# EAGLE board line_follower_pelican (EAGLE 9.3.1)
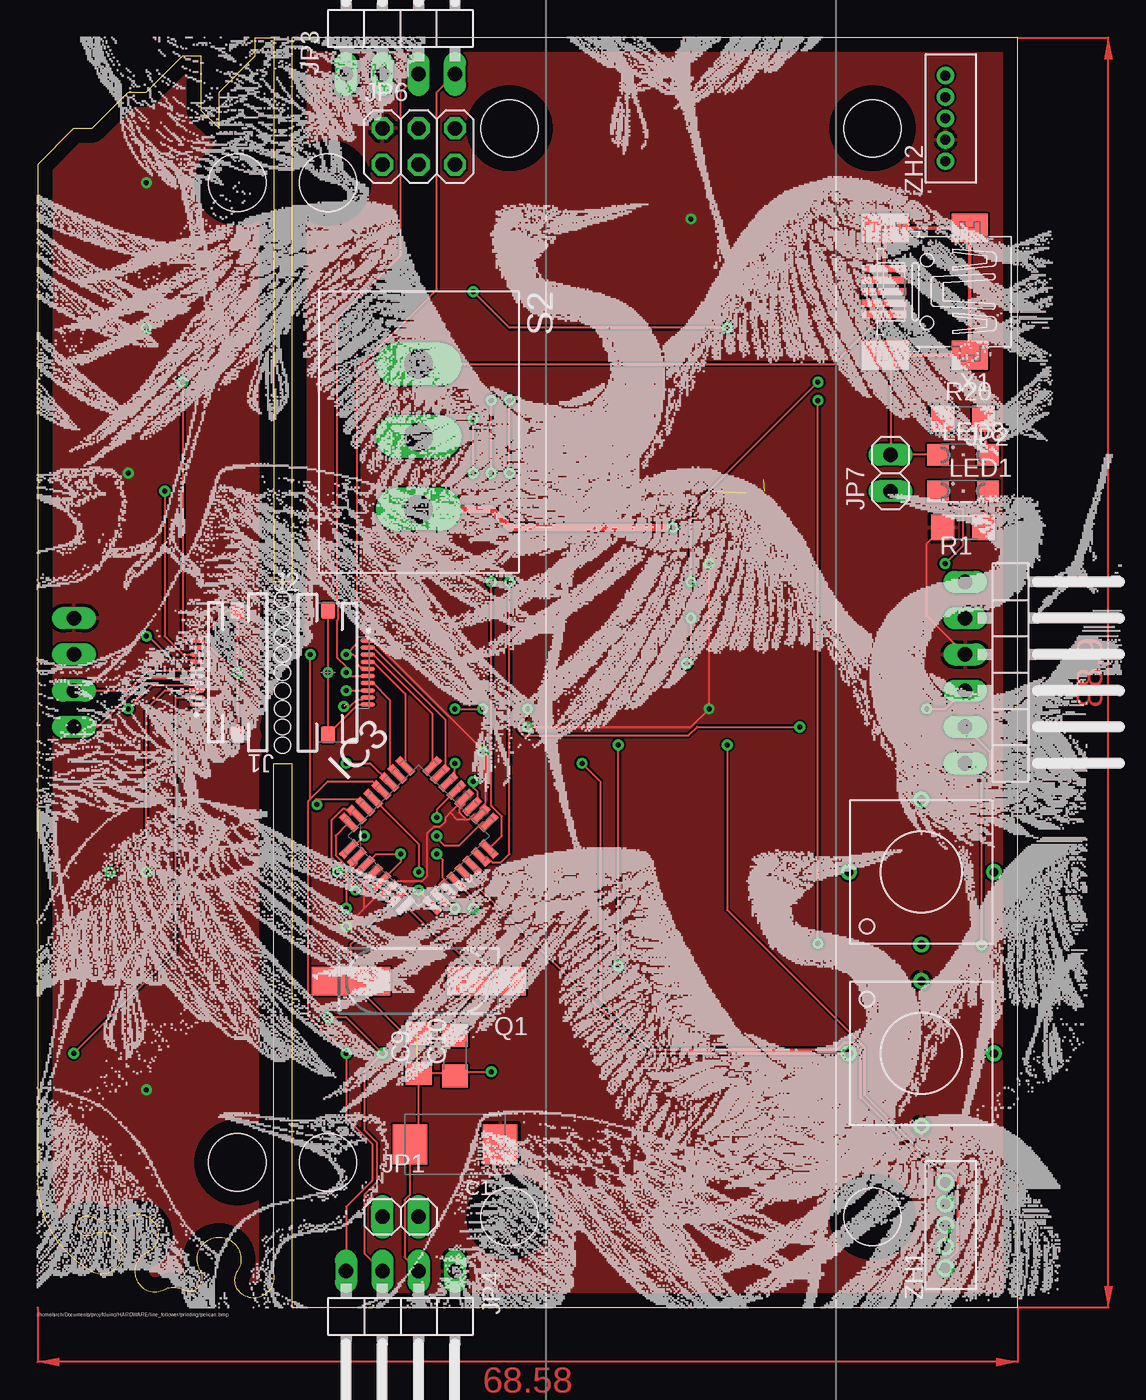
[diagram p0: board, top side]
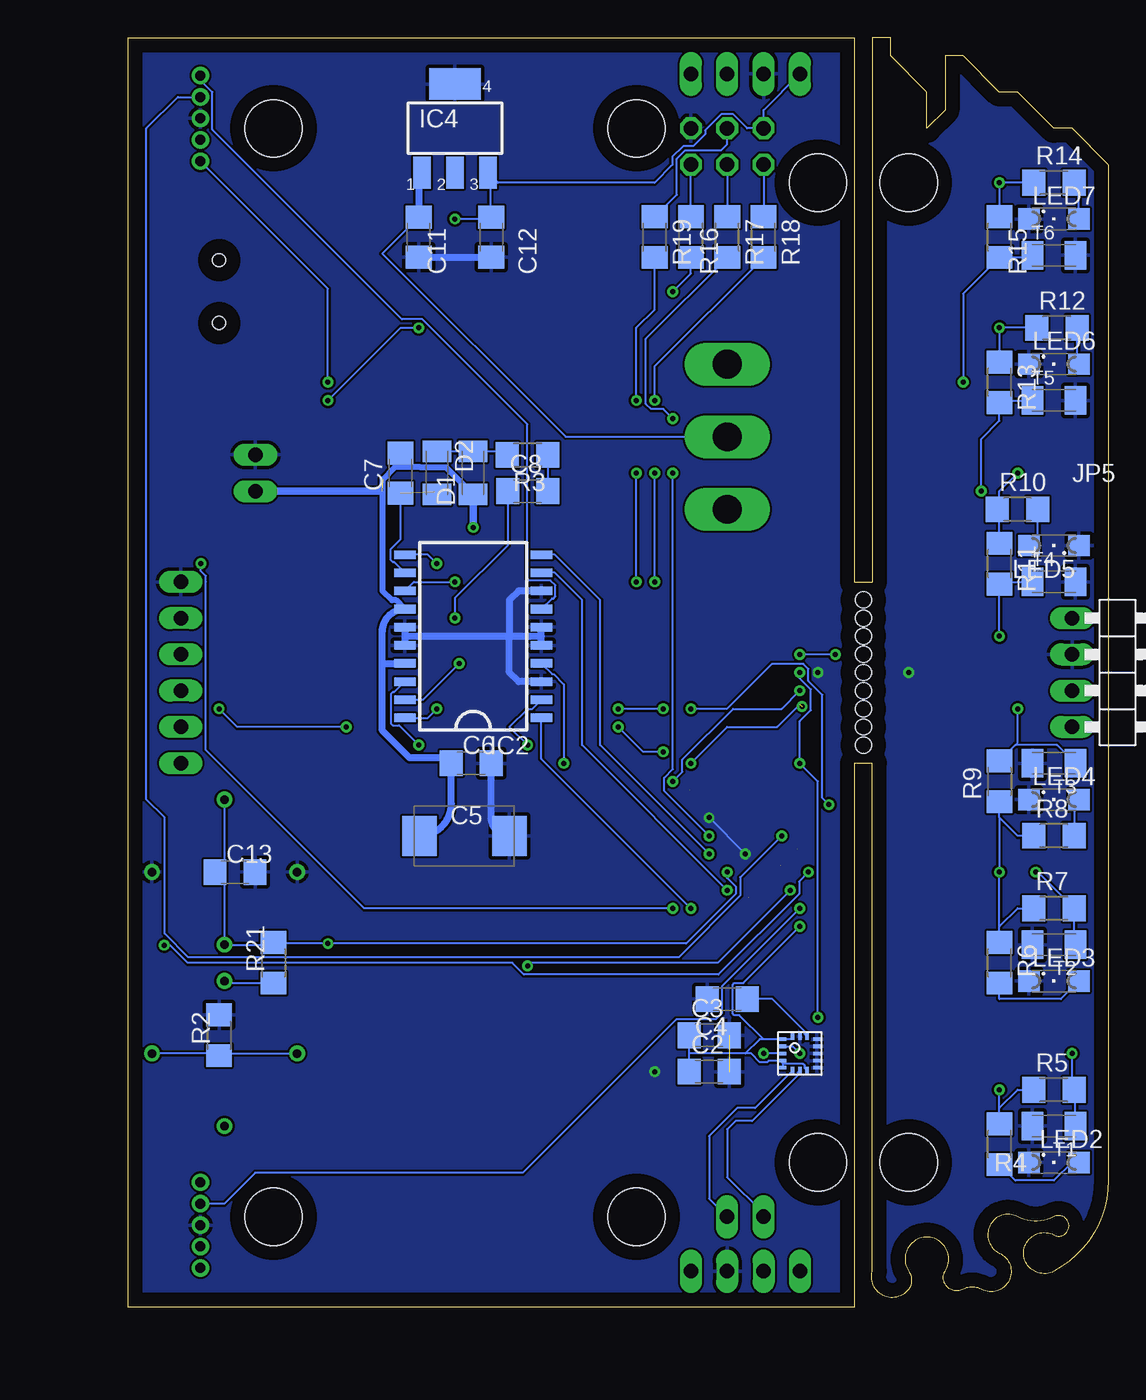
[diagram p1: board, bottom side, seen from below]

Size 68.58 x 88.9 mm. Coordinates in mm from the lower left corner, seen from the top.
Outline: 16.51,38.1 17.78,38.1 17.78,0 68.58,0 68.58,88.9 17.78,88.9 17.78,50.8 16.51,50.8 16.51,88.9 15.24,88.9 15.24,87.63 12.7,85.09 12.7,82.55 11.43,83.82 11.43,87.63 10.16,87.63 7.62,85.09 6.35,85.09 3.81,82.55 2.54,82.55 0,80.01 0,8.89 arc62 3.81,2.54 arc236 3.81,5.08 arc-236 3.81,6.35 arc56 6.35,6.35 arc-183 7.62,3.81 arc183 8.89,1.27 arc-56 10.16,1.27 arc146 11.43,2.54 arc-248 13.97,2.54 arc68 13.97,1.27 arc159 16.51,2.54 16.51,38.1
Copper layers (1*16): Top 0.035mm / dielectric 1.5mm / Bottom 0.035mm
Design rules "default": minimum track width 6mil, minimum drill 0.35mm, track to track 6mil, track to pad 6mil, pad to pad 6mil, via to via 6mil, smd to smd 6mil, copper to edge 40mil, drill to drill 6mil, minimum pad ring 10mil, minimum via ring 8mil, stop-mask expansion 4mil, vias tented up to drill 0mil, thermal gap 10mil
Holes 1.12 mm at 17.14,39.37 17.14,40.64 17.14,41.91 17.14,43.18 17.14,44.45 17.14,45.72 17.14,46.99 17.14,48.26 17.14,49.53
Holes 4 mm at 33.02,6.35 58.42,6.35 58.42,82.55 33.02,82.55 13.97,10.16 13.97,78.74 20.32,78.74 20.32,10.16

## Footprints (pad centres in the part's own frame; a part is rotated, then mirrored left to right if it is on the bottom)
SMC_D = smd 2.4 x 2.8: + -3.15,0; - 3.15,0
C1206 = smd 1.6 x 1.8: 1 -1.4,0; 2 1.4,0
1206 = smd 1.5 x 2: 1 -1.5,0; 2 1.5,0
LGA-16 = smd 0.5 x 0.25: 1 -1.19,1; 2 -1.19,0.5; 3 -1.19,0; 4 -1.19,-0.5; 5 -1.19,-1; 9 1.19,-1; 10 1.19,-0.5; 11 1.19,0; 12 1.19,0.5; 13 1.19,1 | smd 0.25 x 0.5: 6 -0.5,-1.19; 7 0,-1.19; 8 0.5,-1.19; 14 0.5,1.19; 15 0,1.19; 16 -0.5,1.19
SO20 = smd 0.6 x 1.5: 1 -5.715,-4.78; 2 -4.445,-4.78; 3 -3.175,-4.78; 4 -1.905,-4.78; 5 -0.635,-4.78; 6 0.635,-4.78; 7 1.905,-4.78; 8 3.175,-4.78; 9 4.445,-4.78; 10 5.715,-4.78; 11 5.715,4.78; 12 4.445,4.78; 13 3.175,4.78; 14 1.905,4.78; 15 0.635,4.78; 16 -0.635,4.78; 17 -1.905,4.78; 18 -3.175,4.78; 19 -4.445,4.78; 20 -5.715,4.78
TQFP32 = smd 1.473 x 0.508: 1 -4.115,2.794; 2 -4.115,2.007; 3 -4.115,1.194; 4 -4.115,0.406; 5 -4.115,-0.406; 6 -4.115,-1.194; 7 -4.115,-2.007; 8 -4.115,-2.794; 17 4.115,-2.794; 18 4.115,-2.007; 19 4.115,-1.194; 20 4.115,-0.406; 21 4.115,0.406; 22 4.115,1.194; 23 4.115,2.007; 24 4.115,2.794 | smd 0.508 x 1.473: 9 -2.794,-4.115; 10 -2.007,-4.115; 11 -1.194,-4.115; 12 -0.406,-4.115; 13 0.406,-4.115; 14 1.194,-4.115; 15 2.007,-4.115; 16 2.794,-4.115; 25 2.794,4.115; 26 2.007,4.115; 27 1.194,4.115; 28 0.406,4.115; 29 -0.406,4.115; 30 -1.194,4.115; 31 -2.007,4.115; 32 -2.794,4.115
SOT223 = smd 1.219 x 2.235: 1 -2.311,-3.099; 2 0,-3.099; 3 2.311,-3.099 | smd 3.6 x 2.2: 4 0,3.099
GCT_FFC2B05-10-X_REVC = smd 0.3 x 1: 1 -2.25,2.78; 2 -1.75,2.78; 3 -1.25,2.78; 4 -0.75,2.78; 5 -0.25,2.78; 6 0.25,2.78; 7 0.75,2.78; 8 1.25,2.78; 9 1.75,2.78; 10 2.25,2.78 | smd 1.2 x 0.95: 11 -4.35,0; 12 4.35,0
1X02 = drill 1.016 long: 1 -1.27,0; 2 1.27,0
1X06/90 = drill 1.016 long: 1 -6.35,-3.81; 2 -3.81,-3.81; 3 -1.27,-3.81; 4 1.27,-3.81; 5 3.81,-3.81; 6 6.35,-3.81
1X04/90 = drill 1.016 long: 1 -3.81,-3.81; 2 -1.27,-3.81; 3 1.27,-3.81; 4 3.81,-3.81
2X03 = drill 1.016 octagon: 1 -2.54,-1.27; 2 -2.54,1.27; 3 0,-1.27; 4 0,1.27; 5 2.54,-1.27; 6 2.54,1.27
SML1206 = smd 1.5 x 1.5: A 1.75,0; C -1.75,0
CSM-7X-DU = smd 5.5 x 2: 1 -4.75,0; 2 4.75,0
R1206 = smd 1.6 x 1.803: 1 -1.422,0; 2 1.422,0
BUTTON = drill 0.6: A@1 -5.08,0; A@2 5.08,0; B@1 0,5.08; B@2 0,-5.08
DUALSWITCH = drill 2 long: A 0,5.08; B 0,-5.08; COM 0,0
32005-201 = smd 3.1 x 0.5: 1 3,1.6; 2 3,0.8; 3 3,0; 4 3,-0.8; 5 3,-1.6 | smd 2.5 x 2: M1 -3,-4.45; M2 -3,4.45 | smd 3.3 x 2: M3 2.9,4.45; M4 2.9,-4.45 | hole 0.9: 0,2.2; 0,-2.2
B5B-ZR = drill 0.7: 1 7.5,-1.3; 2 6,-1.3; 3 4.5,-1.3; 4 3,-1.3; 5 1.5,-1.3

## Placement (x,y rotation side)
C1  10u  [SMC_D]  29.21,11.43 180 top
C2  100n  [C1206]  27.94,16.51 0 bottom
C3  100n  [C1206]  27.94,19.05 0 bottom
C4  10n  [C1206]  26.67,21.59 180 bottom
C5  100u  [SMC_D]  45.06,33.02 0 bottom
C6  100n  [C1206]  44.58,38.1 0 bottom
C7  10n  [C1206]  49.53,58.42 90 bottom
C8  10n  [C1206]  40.64,57.15 0 bottom
C9  22p  [C1206]  26.67,17.78 90 top
C10  22p  [C1206]  29.21,17.63 90 top
C11  100n  [C1206]  48.26,74.93 270 bottom
C12  100n  [C1206]  43.18,74.93 270 bottom
C13  100n  [C1206]  61.11,30.48 0 bottom
D1  1N4148  [1206]  44.45,58.42 90 bottom
D2  1N4148  [1206]  46.99,58.42 270 bottom
IC1  L3GD20HSMD  [LGA-16]  21.59,17.78 0 bottom
IC2  L6205  [SO20]  44.45,46.99 90 bottom
IC3  ATMEGA328PMA  [TQFP32]  26.67,33.02 45 top
IC4  LF33  [SOT223]  45.72,82.55 0 bottom
J1  FFC2B05-10-X_REVC  [GCT_FFC2B05-10-X_REVC]  13.97,44.45 90 top
J2  FFC2B05-10-X_REVC  [GCT_FFC2B05-10-X_REVC]  20.32,44.45 270 top
JP1  [1X02]  25.4,6.35 0 top
JP2  UART  [1X06/90]  68.72,44.45 270 top
JP3  RDS  [1X04/90]  25.4,90.17 0 top
JP4  LDS  [1X04/90]  25.4,-1.27 180 top
JP5  FDS  [1X04/90]  -1.27,44.45 270 bottom
JP6  ICSP  [2X03]  26.67,81.28 0 top
JP7  3S/4S  [1X02]  59.69,58.42 90 top
LED1  Purple  [SML1206]  64.77,57.15 0 top
LED2  White  [SML1206]  3.81,10.16 0 bottom
LED3  White  [SML1206]  3.81,22.86 0 bottom
LED4  White  [SML1206]  3.81,35.56 0 bottom
LED5  White  [SML1206]  3.81,53.34 180 bottom
LED6  White  [SML1206]  3.81,66.04 0 bottom
LED7  White  [SML1206]  3.81,76.2 0 bottom
LED8  Orange  [SML1206]  64.77,59.69 0 top
Q1  10MHz  [CSM-7X-DU]  26.67,22.86 180 top
R1  680  [R1206]  64.77,54.61 180 top
R2  1k  [R1206]  62.23,19.05 90 bottom
R3  220  [R1206]  40.64,59.69 180 bottom
R4  220  [R1206]  7.62,11.43 270 bottom
R5  10k  [R1206]  3.81,15.24 0 bottom
R6  220  [R1206]  7.62,24.13 270 bottom
R7  10k  [R1206]  3.81,27.94 0 bottom
R8  220  [R1206]  3.81,33.02 0 bottom
R9  10k  [R1206]  7.62,36.83 90 bottom
R10  220  [R1206]  6.35,55.88 0 bottom
R11  10k  [R1206]  7.62,52.07 270 bottom
R12  220  [R1206]  3.59,68.58 0 bottom
R13  10k  [R1206]  7.62,64.77 270 bottom
R14  220  [R1206]  3.81,78.74 0 bottom
R15  10k  [R1206]  7.62,74.93 270 bottom
R16  120  [R1206]  29.21,74.93 270 bottom
R17  120  [R1206]  26.67,74.93 270 bottom
R18  120  [R1206]  24.13,74.93 270 bottom
R19  120  [R1206]  31.75,74.93 270 bottom
R20  220  [R1206]  64.77,62.23 0 top
R21  100k  [R1206]  58.42,24.13 90 bottom
S1  BUTTON  [BUTTON]  61.85,17.78 0 top
S2  DUALSWITCH  [DUALSWITCH]  26.67,60.96 180 top
S3  BUTTON  [BUTTON]  61.85,30.48 90 top
T1  ELPT15-21C  [1206]  3.81,12.7 180 bottom
T2  ELPT15-21C  [1206]  3.81,25.4 180 bottom
T3  ELPT15-21C  [1206]  3.81,38.1 180 bottom
T4  ELPT15-21C  [1206]  3.81,50.8 0 bottom
T5  ELPT15-21C  [1206]  3.81,63.5 0 bottom
T6  ELPT15-21C  [1206]  3.81,73.66 0 bottom
X1  MINI-USB-SCHIELD-32005-201  [32005-201]  62.23,71.12 180 top
ZH1  LM  [B5B-ZR]  62.23,1.27 90 top
ZH2  RM  [B5B-ZR]  62.23,78.74 90 top

## Library data of the parts
C1-C13 = rcl; SPICEPREFIX: C
D1 D2 IC1-IC3 S1-S3 T1-T6 = martinmake
IC4 = linear
J1 J2 = FFC2B05-10-X_REVC; AVAILABILITY: Unavailable; DESCRIPTION: FFC/FPC CONNECTOR, RECEPTACLE, 10POS, 1ROW; Series: FFC2B05; Gender: Receptacle; Pitch Spacing: 0.5mm; No. of Contact...; MF: Global Connector Technology; MP: FFC2B05-10-T; PACKAGE: None; PRICE: None
JP1-JP7 = pinhead
LED1-LED8 = led
Q1 = crystal; OC_FARNELL: unknown; OC_NEWARK: unknown
R1-R21 = rcl; SPICEPREFIX: R
X1 = con-cypressindustries; OC_FARNELL: unknown; OC_NEWARK: unknown
ZH1 ZH2 = jst

## Nets
!RESET: C13.1 IC3.29 R16.2 R21.2 S3.A@1 S3.A@2
!SS: IC3.14
ADC0: IC3.23 J2.2
ADC1: IC3.24 J2.3
ADC2: IC3.25 J2.4
ADC3: IC3.26 J2.7
ADC6: IC3.19 J2.8
ADC7: IC3.22 J2.9
DIRA: IC2.2 IC3.2
DIRB: IC2.10 IC3.11
F_ADC0: J1.2 R5.2 T1.1
F_ADC1: J1.3 R7.2 T2.1
F_ADC2: J1.4 R9.2 T3.1
F_ADC3: J1.7 R11.2 T4.1
F_ADC6: J1.8 R13.2 T5.1
F_ADC7: J1.9 R15.2 T6.1
F_GND: J1.10 J1.11 J1.12 JP5.2 LED2.C LED3.C LED4.C LED5.C LED6.C LED7.C T1.2 T2.2 T3.2 T4.2 T5.2 T6.2
F_SCL: J1.5 JP5.4
F_SDA: J1.6 JP5.3
F_VCC: J1.1 JP5.1 R4.1 R5.1 R6.1 R7.1 R8.1 R9.1 R10.1 R11.1 R12.1 R13.1 R14.1 R15.1
GND: C1.- C2.2 C3.2 C4.2 C5.- C6.2 C9.1 C10.1 C11.2 C12.2 C13.2 IC1.9 IC1.10 IC1.11 IC1.12 IC1.13 IC1.15 IC2.3 IC2.5 IC2.6 IC2.8 IC2.15 IC2.16 IC3.3 IC3.5 IC3.21 IC4.4 J2.10 J2.11 J2.12 JP2.1 JP3.2 JP4.2 JP6.6 JP7.2 LED8.C R2.2 S3.B@1 S3.B@2 X1.5 X1.M1 X1.M2 X1.M3 X1.M4 ZH1.3 ZH2.3
INT0: IC3.32 ZH1.2
INT1: IC3.1 ZH2.2
LED: IC3.12 LED1.C
MISO: IC3.16 R18.2
MOSI: IC3.15 R19.2
N$1: LED4.A R8.2
N$2: C7.1 D2.2 IC2.12
N$3: D1.2 D2.1 R3.2
N$4: C8.2 R3.1
N$5: LED1.A R1.1
N$6: C4.1 IC1.14
N$7: C8.1 IC2.19
N$8: IC1.7 JP1.1
N$9: IC1.6 JP1.2
N$10: C11.1 IC4.1 S2.COM
N$12: LED5.A R10.2
N$22: LED7.A R14.2
N$30: LED6.A R12.2
N$33: JP6.1 R18.1
N$36: LED8.A R20.2
N$43: LED3.A R6.2
N$47: LED2.A R4.2
N$49: JP6.3 R17.1
N$50: JP6.5 R16.1
N$51: JP6.4 R19.1
OC0A: IC2.1 IC3.10
OC0B: IC2.9 IC3.9
OUT1A: IC2.4 ZH1.1
OUT1B: IC2.7 ZH2.1
OUT2A: IC2.18 ZH1.5
OUT2B: IC2.13 ZH2.5
RX: IC3.30 JP2.4
SCK: IC3.17 R17.2
SCL: IC1.2 IC3.28 J2.5 JP3.4 JP4.4
SDA: IC1.3 IC3.27 J2.6 JP3.3 JP4.3
TX: IC3.31 JP2.5
USR: IC3.13 R2.1 S1.A@1 S1.A@2
VB: C5.+ C6.1 C7.2 D1.1 IC2.14 IC2.17 JP7.1 S2.A
VCC: C1.+ C2.1 C3.1 C12.1 IC1.1 IC1.4 IC1.5 IC1.8 IC1.16 IC2.11 IC2.20 IC3.4 IC3.6 IC3.18 IC3.20 IC4.3 J2.1 JP2.3 JP3.1 JP4.1 JP6.2 R1.2 R20.1 R21.1 S1.B@1 S1.B@2 ZH1.4 ZH2.4
VUSB: S2.B X1.1
XTAL1: C9.2 IC3.7 Q1.2
XTAL2: C10.2 IC3.8 Q1.1

## Tracks (layer width: path | path; a pad name or v marks a point on that pad's centre or on a via)
!RESET  (via drill 0.35)
  Top 0.152: IC3.29 26.67,32.45 v26.67,30.48 | v54.61,25.48 v54.61,63.5 | v48.26,68.58 33.02,68.58 v30.48,71.12
  Bottom 0.152: 58.5,25.48 58.57,25.4 S3.A@1 61.85,29.82 C13.1 61.85,31.14 S3.A@2 | 58.5,25.48 R21.2 | v26.67,30.48 26.67,30.07 26.06,29.46 26.06,28.96 29.55,25.48 v54.61,25.48 58.5,25.48 | v54.61,63.5 49.53,68.58 v48.26,68.58 | v30.48,71.12 29.21,72.39 R16.2
ADC0
  Top 0.152: J2.2 23.48,46.2 28.53,41.15 28.53,37.72 IC3.23 | IC3.23
ADC1
  Top 0.152: J2.3 23.48,45.7 27.6,41.58 IC3.24 | IC3.24
ADC2
  Top 0.152: J2.4 23.48,45.2 25.74,42.95 IC3.25
ADC3
  Top 0.152: J2.7 23.48,43.7 24.66,42.53 24.66,37.87 IC3.26 | IC3.26
ADC6  (via drill 0.35)
  Top 0.152: 22.71,43.2 J2.8 23.08,43.18 v21.59,43.18 | 30.8,35.46 IC3.19 | IC3.19 | v30.48,36.83 30.48,36.39 30.8,36.08 30.8,35.46 | IC3.19 30.8,35.46
  Bottom 0.152: v30.48,36.83 29.82,37.49 29.82,38.35 26.26,41.91 22.86,41.91 v21.59,43.18
ADC7  (via drill 0.35)  (1 unrouted)
  Top 0.152: J2.9 22.86,42.7 | 22.86,42.7 22.71,42.7 | IC3.22 | IC3.22 29.21,37.25 v29.21,38.1 | v21.43,42.07 21.86,42.07 22.37,42.58 22.74,42.58 22.86,42.7
  Bottom 0.152: v29.21,38.1 26.67,40.64 23.18,40.64 21.59,42.23
DIRA  (via drill 0.35)
  Top 0.152: IC3.2 22.34,31.06 21.99,30.71 21.99,29.61 21.89,29.52 21.95,29.52 v22.25,29.21 | v40.64,23.92 v40.64,39.37
  Bottom 0.152: v22.25,29.21 27.33,24.13 40.64,24.13 v40.64,23.92 | v40.64,39.37 41.91,40.64 40.64,41.91 40.3,41.91 IC2.2
DIRB  (via drill 0.35)
  Top 0.152: IC3.11 28.73,29.7 28.36,30.07 28.36,31.33 v27.94,31.75
  Bottom 0.152: v27.94,31.75 35.56,39.37 35.56,49.53 38.73,52.7 IC2.10
F_ADC0  (via drill 0.35)
  Top 0.152: J1.2 9.68,42.7 9.68,24.92 v2.54,17.78
  Bottom 0.152: T1.1 2.31,15.16 R5.2 2.54,15.39 v2.54,17.78
F_ADC1  (via drill 0.35)
  Top 0.152: J1.3 8.91,43.2 7.62,41.91 7.62,33.02 v5.08,30.48
  Bottom 0.152: T2.1 2.39,25.48 R7.2 4.93,30.48 v5.08,30.48
F_ADC2  (via drill 0.35)
  Top 0.152: J1.4 11.07,43.58 8.02,43.58 v6.35,41.91
  Bottom 0.152: T3.1 3.58,39.37 6.5,39.37 | 6.5,39.37 R9.2 | 6.5,39.37 6.35,39.52 v6.35,41.91
F_ADC3  (via drill 0.35)
  Top 0.152: J1.7 11.07,45.32 9.41,45.32 7.75,46.99 v7.62,46.99
  Bottom 0.152: v7.62,46.99 R11.2 7.47,50.8 T4.1
F_ADC6  (via drill 0.35)
  Top 0.152: J1.8 10.18,45.7 8.89,46.99 v8.89,57.15
  Bottom 0.152: T5.1 7.47,63.5 R13.2 7.62,62.08 8.89,60.81 v8.89,57.15
F_ADC7  (via drill 0.35)
  Top 0.152: J1.9 10.8,46.2 10.16,46.84 v10.16,64.77
  Bottom 0.152: T6.1 5.46,73.51 R15.2 10.16,70.97 v10.16,64.77
F_GND  (via drill 0.35)
  Top 0.152: 13.97,44.3 v13.97,44.45 J1.12 13.29,48.8 J1.10 11.31,46.58 11.7,46.58 13.97,44.3 | 13.97,44.3 J1.11
  Bottom 0.152: LED7.C 5.56,75.72
  pour Bottom: 0,0 16.51,0 16.51,88.9 0,88.9
F_SCL
  Top 0.152: J1.5 11.07,44.08 7.66,44.08 4.22,40.64 JP5.4
F_SDA
  Top 0.152: JP5.3 6.33,43.18 7.73,44.58 11.07,44.58 J1.6
F_VCC  (via drill 0.35)
  Bottom 0.152: R4.1 7.62,13.97 | 7.62,13.97 6.35,15.24 R5.1 | R6.1 7.62,26.67 | 7.62,26.67 6.35,27.94 R7.1 | R8.1 6.35,33.02 7.62,34.29 | 7.62,34.29 R9.1 | 7.62,26.67 v7.62,30.48 7.62,34.29 | 7.62,13.97 v7.62,15.24 | R15.1 v7.62,78.74 R14.1 | R12.1 v7.62,68.58 R13.1 | v6.35,58.42 7.62,57.15 7.62,56.03 R10.1 7.62,55.73 R11.1
  pour Top: 16.51,88.9 16.51,0 0,0 0,88.9
GND  (via drill 0.35)  (3 unrouted)
  Top 0.152: IC3.5 | IC3.3 23.71,31.75 v25.4,31.75 25.4,31.18 IC3.5 | IC3.21 27.94,34.87 v27.94,34.29 | LED8.C JP7.2 59.69,66.31 X1.M3 | J2.10 22.42,42.2 J2.12 v20.32,44.45 J2.11 20.59,48.53 | v31.75,16.51 29.49,16.51 C10.1 29.06,16.38 C9.1 26.67,12.04 C1.- 26.06,7.9 25.68,7.52 25.68,3.53 JP4.2
  Top 0.254: X1.M3 X1.M2 X1.M1 X1.M4 X1.5
  Bottom 0.152: v27.94,34.29 v25.4,31.75
  Bottom 0.5: C5.- arc90 43.18,34.29 C6.2 | C11.2 C12.2 | IC2.5 39.67,46.99 | 39.67,46.99 IC2.6 | IC2.15 49.23,46.99 | 49.23,46.99 IC2.16 | 49.23,46.99 41.91,46.99 | 41.91,46.99 39.67,46.99 | IC2.3 41.27,43.81 41.91,44.45 41.91,46.99 | IC2.8 41.27,50.16 41.91,49.53 41.91,46.99
  pour Bottom: 17.78,0 68.58,0 68.58,88.9 17.78,88.9
INT0  (via drill 0.35)
  Top 0.152: v21.59,27.94 21.59,30.92 20.86,31.65 20.86,33.02 IC3.32
  Bottom 0.152: v21.59,27.94 27.04,22.49 27.04,20.59 27.46,20.18 30.23,20.18 40.97,9.44 59.7,9.44 61.87,7.27 ZH1.2
INT1  (via drill 0.35)  (1 unrouted)
  Top 0.152: IC3.1 21.79,31.95 | IC3.1 21.41,31.71 | IC3.1 21.93,32.09 v22.86,33.02
  Bottom 0.152: v22.86,33.02 25.76,30.12 25.76,28.83 30.07,24.52 64.38,24.52 66.04,26.19 66.04,34.29 67.31,35.56 67.31,82.55 65.12,84.74 ZH2.2
LED  (via drill 0.35)
  Top 0.152: IC3.12 30.48,28.64 v30.48,27.94 | v63.5,52.07 64.77,53.34 64.77,55.88 64.29,55.88 LED1.C
  Bottom 0.152: v30.48,27.94 52.07,27.94 63.16,39.03 63.16,50.8 63.16,51.21 63.5,51.55 v63.5,52.07
MISO  (via drill 0.35)
  Top 0.152: v31.75,50.8 31.75,35.12 32.48,34.39 32.48,33.02 IC3.16 | v31.75,58.42 v31.75,63.5
  Bottom 0.152: v31.75,50.8 v31.75,58.42 | v31.75,63.5 31.75,65.89 R18.2
MOSI  (via drill 0.35)
  Top 0.152: IC3.15 31.43,31.53 31.8,31.16 32.43,31.16 33.02,31.75 v33.02,50.8 | v33.02,58.42 v33.02,63.5
  Bottom 0.152: v33.02,50.8 v33.02,58.42 | v33.02,63.5 33.02,68.58 31.75,69.85 R19.2
N$1
  Bottom 0.152: R8.2 2.39,35.23 LED4.A
N$2  (1 unrouted)
  Bottom 0.152: 47.17,57.1 D2.2 | C7.1 49.53,53.78 50.21,53.1 50.21,52.31 50.08,52.18 49.97,52.18 IC2.12
N$3
  Bottom 0.152: D2.1 D1.2 42.29,59.92 R3.2
N$4
  Bottom 0.152: R3.1 39.24,59.67 C8.2
N$5
  Top 0.152: R1.1 LED1.A
N$6
  Bottom 0.152: IC1.14 21.24,19.12 21.24,19.32 23.51,21.59 C4.1
N$7  (via drill 0.35)
  Top 0.152: v45.42,45.09 45.72,45.38 v45.72,48.26
  Bottom 0.152: IC2.19 47.96,42.55 v45.42,45.09 | C8.1 42.04,53.34 45.72,49.66 v45.72,48.26
N$8
  Bottom 0.152: JP1.1 24.13,6.58 26.67,9.12 26.67,12.47 26.09,13.06 24.92,13.06 21.74,16.25 21.74,16.44 IC1.7
N$9
  Bottom 0.152: JP1.2 27.94,7.62 27.94,12.01 25.98,13.97 24.71,13.97 IC1.6
N$10
  Bottom 0.152: C11.1 50.8,73.79 37.97,60.96 S2.COM
  Bottom 0.5: IC4.1 48.26,79.22 C11.1
N$12
  Bottom 0.152: LED5.A 4.93,53.97 R10.2
N$22
  Bottom 0.152: LED7.A 2.06,78.41 R14.2
N$30
  Bottom 0.152: LED6.A 2.17,66.15 R12.2
N$33
  Bottom 0.152: JP6.1 R18.1
N$36
  Top 0.152: LED8.A R20.2
N$43
  Bottom 0.152: LED3.A 3.33,21.59 7.62,21.59 R6.2
N$47
  Bottom 0.152: LED2.A 2.54,10.16 3.81,8.89 6.5,8.89 R4.2
N$49
  Bottom 0.152: JP6.3 R17.1
N$50
  Bottom 0.152: R16.1 JP6.5
N$51
  Bottom 0.152: JP6.4 26.67,81.43 27.1,81 29.62,81 30.2,80.42 30.2,77.9 R19.1
OC0A  (via drill 0.35)
  Top 0.152: IC3.10 28.46,28.69 v29.21,27.94
  Bottom 0.152: v29.21,27.94 39.67,38.4 IC2.1
OC0B  (via drill 0.35)
  Top 0.152: IC3.9 27.6,28.28 v26.67,29.21
  Bottom 0.152: v26.67,29.21 36.83,39.37 36.83,49.53 38.73,51.44 IC2.9
OUT1A  (via drill 0.35)
  Top 0.152: v38.1,38.1 39.37,36.83 39.37,21.59 42.88,18.09 55.97,18.09 56.45,18.56 57.09,18.56 57.55,18.1 57.55,14.75 ZH1.1
  Bottom 0.152: IC2.4 38.93,44.34 38.83,44.34 38.1,43.62 v38.1,38.1
OUT1B
  Bottom 0.152: IC2.7 38.93,49.64 38.83,49.64 38.69,49.77 38.69,50.56 39.04,50.91 40.52,50.91 40.65,51.04 40.65,61.83 48.01,69.19 49.43,69.19 62.7,82.45 62.7,85.08 63.53,85.92 ZH2.1
OUT2A  (via drill 0.35)
  Top 0.152: v48.26,39.37 48.26,27.83 57.86,18.23 57.86,14.88 63.13,9.6 63.88,9.6 64.36,9.12 64.36,3.92 63.53,3.09 ZH1.5
  Bottom 0.152: IC2.18 49.97,43.07 50.08,43.07 50.21,42.94 50.21,40.88 50.08,40.75 49.64,40.75 v48.26,39.37
OUT2B  (via drill 0.35)
  Top 0.152: v45.72,50.8 45.72,55.88 v54.61,64.77
  Bottom 0.152: IC2.13 48.59,50.8 v45.72,50.8 | v54.61,64.77 54.61,71.32 ZH2.5
RX  (via drill 0.35)
  Top 0.152: IC3.30 22.44,35.56 19.48,35.56 19.27,35.34 19.4,35.34 v19.55,35.2 | v29.21,41.91 v31.14,41.91 31.45,41.91 | v53.34,40.64 46.15,40.64 45.54,40.03 34.04,40.03 33.68,40.39 33.68,40.89 34.29,41.5 v34.29,41.91 | v62.23,41.91 63.5,41.91 64.77,43.18 JP2.4
  Bottom 0.152: v19.55,35.2 20.02,35.67 20.02,42.89 20.98,43.86 20.98,44.7 21.34,45.06 23.54,45.06 26.69,41.91 v29.21,41.91 | v31.14,41.91 v34.29,41.91 | v53.34,40.64 60.96,40.64 v62.23,41.91
SCK  (via drill 0.35)
  Top 0.152: IC3.17 31.12,33.95 29.48,32.31 28.5,32.31 27.94,32.87 v27.94,33.02 | v30.48,58.42 v30.48,62.23
  Bottom 0.152: v30.48,58.42 30.48,37.69 31.09,37.08 31.09,36.17 v27.94,33.02 | v30.48,62.23 31.14,62.89 32,62.89 32.36,63.25 32.36,67.82 R17.2
SCL  (via drill 0.35)
  Top 0.152: IC3.28 23.43,36.83 20.32,36.83 19.05,35.56 | 19.05,35.56 18.94,35.45 18.94,20.43 v21.59,17.78 21.59,13.26 23.41,11.44 23.41,8.88 21.59,7.06 JP4.4 | 19.05,35.56 19.05,45.72 v19.1,45.72 | J2.5 22.98,44.82 22.59,44.82 22.37,45.04 22.37,45.43 22.08,45.72 v21.59,45.72 22.37,46.5 22.37,65.69 27.94,71.25 27.94,85.09 JP3.4
  Bottom 0.152: IC1.2 22.09,18.28 v21.59,17.78 | v19.1,45.72 v21.59,45.72
SDA  (via drill 0.35)
  Top 0.152: v20.32,20.32 21.59,20.32 v24.13,17.78 22.86,16.51 22.86,12.42 23.72,11.57 23.72,8.75 22.86,7.9 22.86,3.81 JP4.3 | v21.59,38.1 23.28,38.1 IC3.27 | J2.6 21.84,44.2 v21.59,44.45 21.59,44.86 20.98,45.47 20.98,48.13 21.02,48.17 21.02,49.42 20.98,49.47 20.98,69.24 25.4,73.66 25.4,85.09 JP3.3
  Bottom 0.152: IC1.3 v24.13,17.78 | v20.32,20.32 20.32,36.83 v21.59,38.1 21.59,41.05 20.82,41.82 20.82,43.27 21.59,44.04 v21.59,44.45
TX  (via drill 0.35)
  Top 0.152: IC3.31 21.91,34.51 21.54,34.88 21.35,34.88 20.55,34.09 20.55,31.52 21.29,30.79 21.29,30.48 v20.98,30.48 | v66.08,25.36 66.08,37.1 66.66,37.69 66.66,38.89 JP2.5
  Bottom 0.152: v20.98,30.48 21.65,29.82 21.65,28.96 27.3,23.31 40.89,23.31 41.71,24.13 64.41,24.13 65.65,25.36 v66.08,25.36
USR
  Top 0.152: IC3.13 42.48,17.78 S1.A@1
  Bottom 0.152: S1.A@2 62.38,17.78 R2.1 62.08,17.78 S1.A@1
VB  (via drill 0.35)  (1 unrouted)
  Top 0.508: S2.A 31.75,55.88 33.02,54.61 v44.45,54.61
  Bottom 0.406: C7.2 49.53,59.22 49.93,58.82 | 49.93,58.82 50.79,57.97 50.79,50.17 50.13,49.51 49.84,49.51 IC2.14 | D1.1 46.34,58.81 48.14,58.81 48.14,58.82 49.93,58.82
  Bottom 0.5: C5.+ arc-90 45.98,35.25 C6.1 arc90 46.35,38.48 48.9,38.48 50.8,40.38 50.8,45.09 | 50.8,45.09 IC2.17 | 50.8,45.09 50.8,47.33 arc90 IC2.14
  Bottom 0.508: v44.45,54.61 D1.1 | JP7.1 52.07,57.15 50.84,57.15
VCC  (via drill 0.35)
  Top 0.152: v46.99,52.07 v46.99,41.91 45.72,40.64 v34.29,40.64 | v21.59,26.67 22.86,27.94 | 22.86,27.94 24.19,29.27 IC3.6 25.21,29.87 26.92,29.87 27.28,30.23 27.28,33.22 27.75,33.68 28.19,33.68 28.55,34.04 28.55,34.32 28.86,34.64 | IC3.4 22.86,29.79 22.86,27.94 | 28.86,34.64 IC3.20 29.87,35.21 29.5,34.84 29.5,34.65 29.99,34.16 | 28.86,34.64 29.34,34.16 29.99,34.16 | 29.99,34.16 30.18,34.16 30.53,34.51 IC3.18 31,34.98 31.35,35.33 31.35,38.83 31.28,38.9 | J2.1 23.22,46.58 23.61,46.58 31.28,38.9 | 31.28,38.9 v31.14,38.9 | JP2.3 62.23,48.4 62.23,53.49 R1.2
  Bottom 0.152: C2.1 29.34,17.78 | 29.34,17.78 C3.1 | IC1.16 22.28,18.78 IC1.1 24.13,18.78 | 24.13,18.78 24.4,18.78 25.4,17.78 | 25.4,17.78 29.34,17.78 | IC1.8 21.24,16.74 21.24,16.93 21.37,17.07 22.78,17.07 IC1.4 | 25.4,17.78 24.99,17.78 24.38,17.17 23.88,17.17 23.77,17.28 IC1.4 | IC1.4 IC1.5 | S1.B@1 61.7,22.71 R21.1 | IC2.20 47.62,41.27 v46.99,41.91 | v46.99,52.07 47.62,52.7 IC2.11 | C12.1 43.24,76.27 | 43.24,76.27 43.31,76.2 v45.72,76.2 | 43.24,76.27 43.24,79.29 IC4.3 42.7,78.74 31.75,78.74 30.5,79.98 30.5,80.55 29.75,81.31 29.05,81.31 28.22,82.14 28.22,82.4 27.08,83.54 26.26,83.54 25.27,82.55 JP6.2 24.13,83.82 JP3.1 | 24.13,18.78 25.81,20.46 26.16,20.46 26.3,20.59 26.3,22.59 26.16,22.72 25.54,22.72 v21.59,26.67 | v31.14,38.9 32.55,38.9 v34.29,40.64
  pour Top: 17.78,88.9 68.58,88.9 68.58,0 17.78,0
VUSB
  Top 0.152: X1.1 57.61,67.9 57.59,67.9 55.73,66.04 S2.B
XTAL1  (1 unrouted)
  Top 0.152: C9.2 25.6,19.18 Q1.2 21.92,25.43 IC3.7
XTAL2
  Top 0.152: C10.2 29.21,20.65 Q1.1 29.05,25.23 28.64,25.23 IC3.8
(copper drawn outside any net)
  shapes: Top area x2

## Text on the board
tPlace: /home/arch/Documents/proj/fduino/HARDWARE/line_follower/printing/pelican.bmp